# Allegro board DECADECOUNTERPC30new.brd
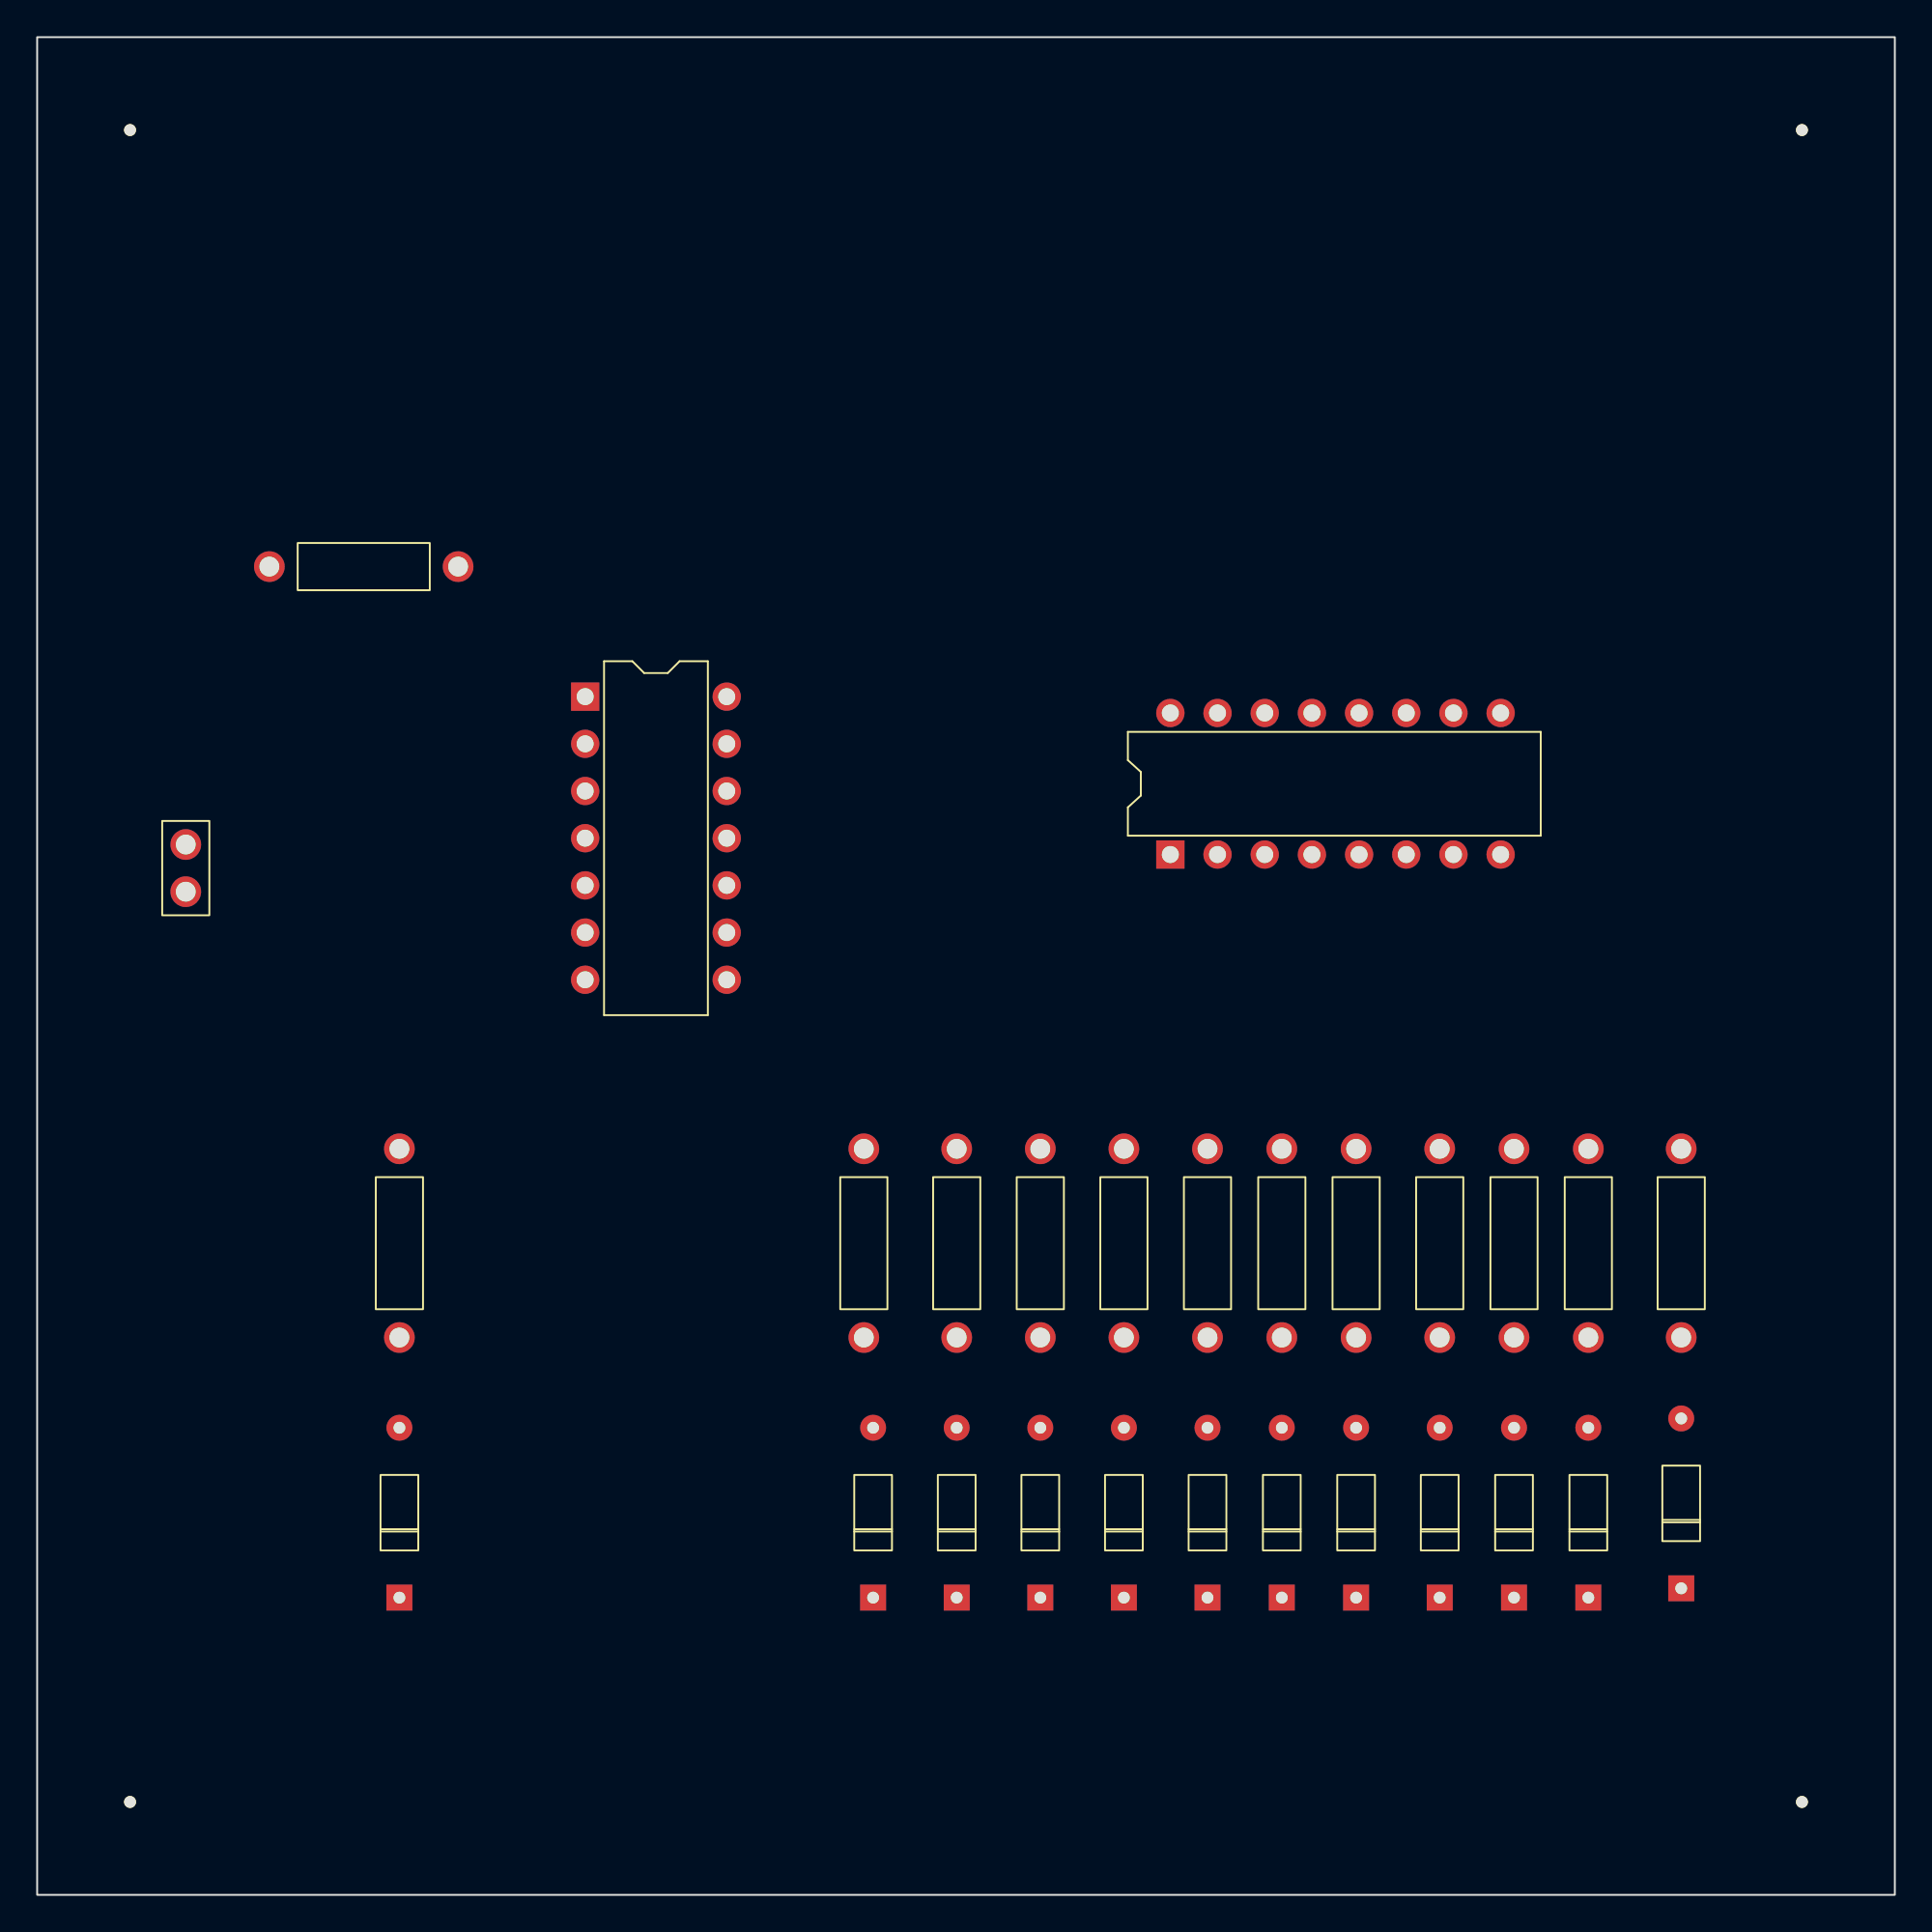
[diagram p0: board, top side]
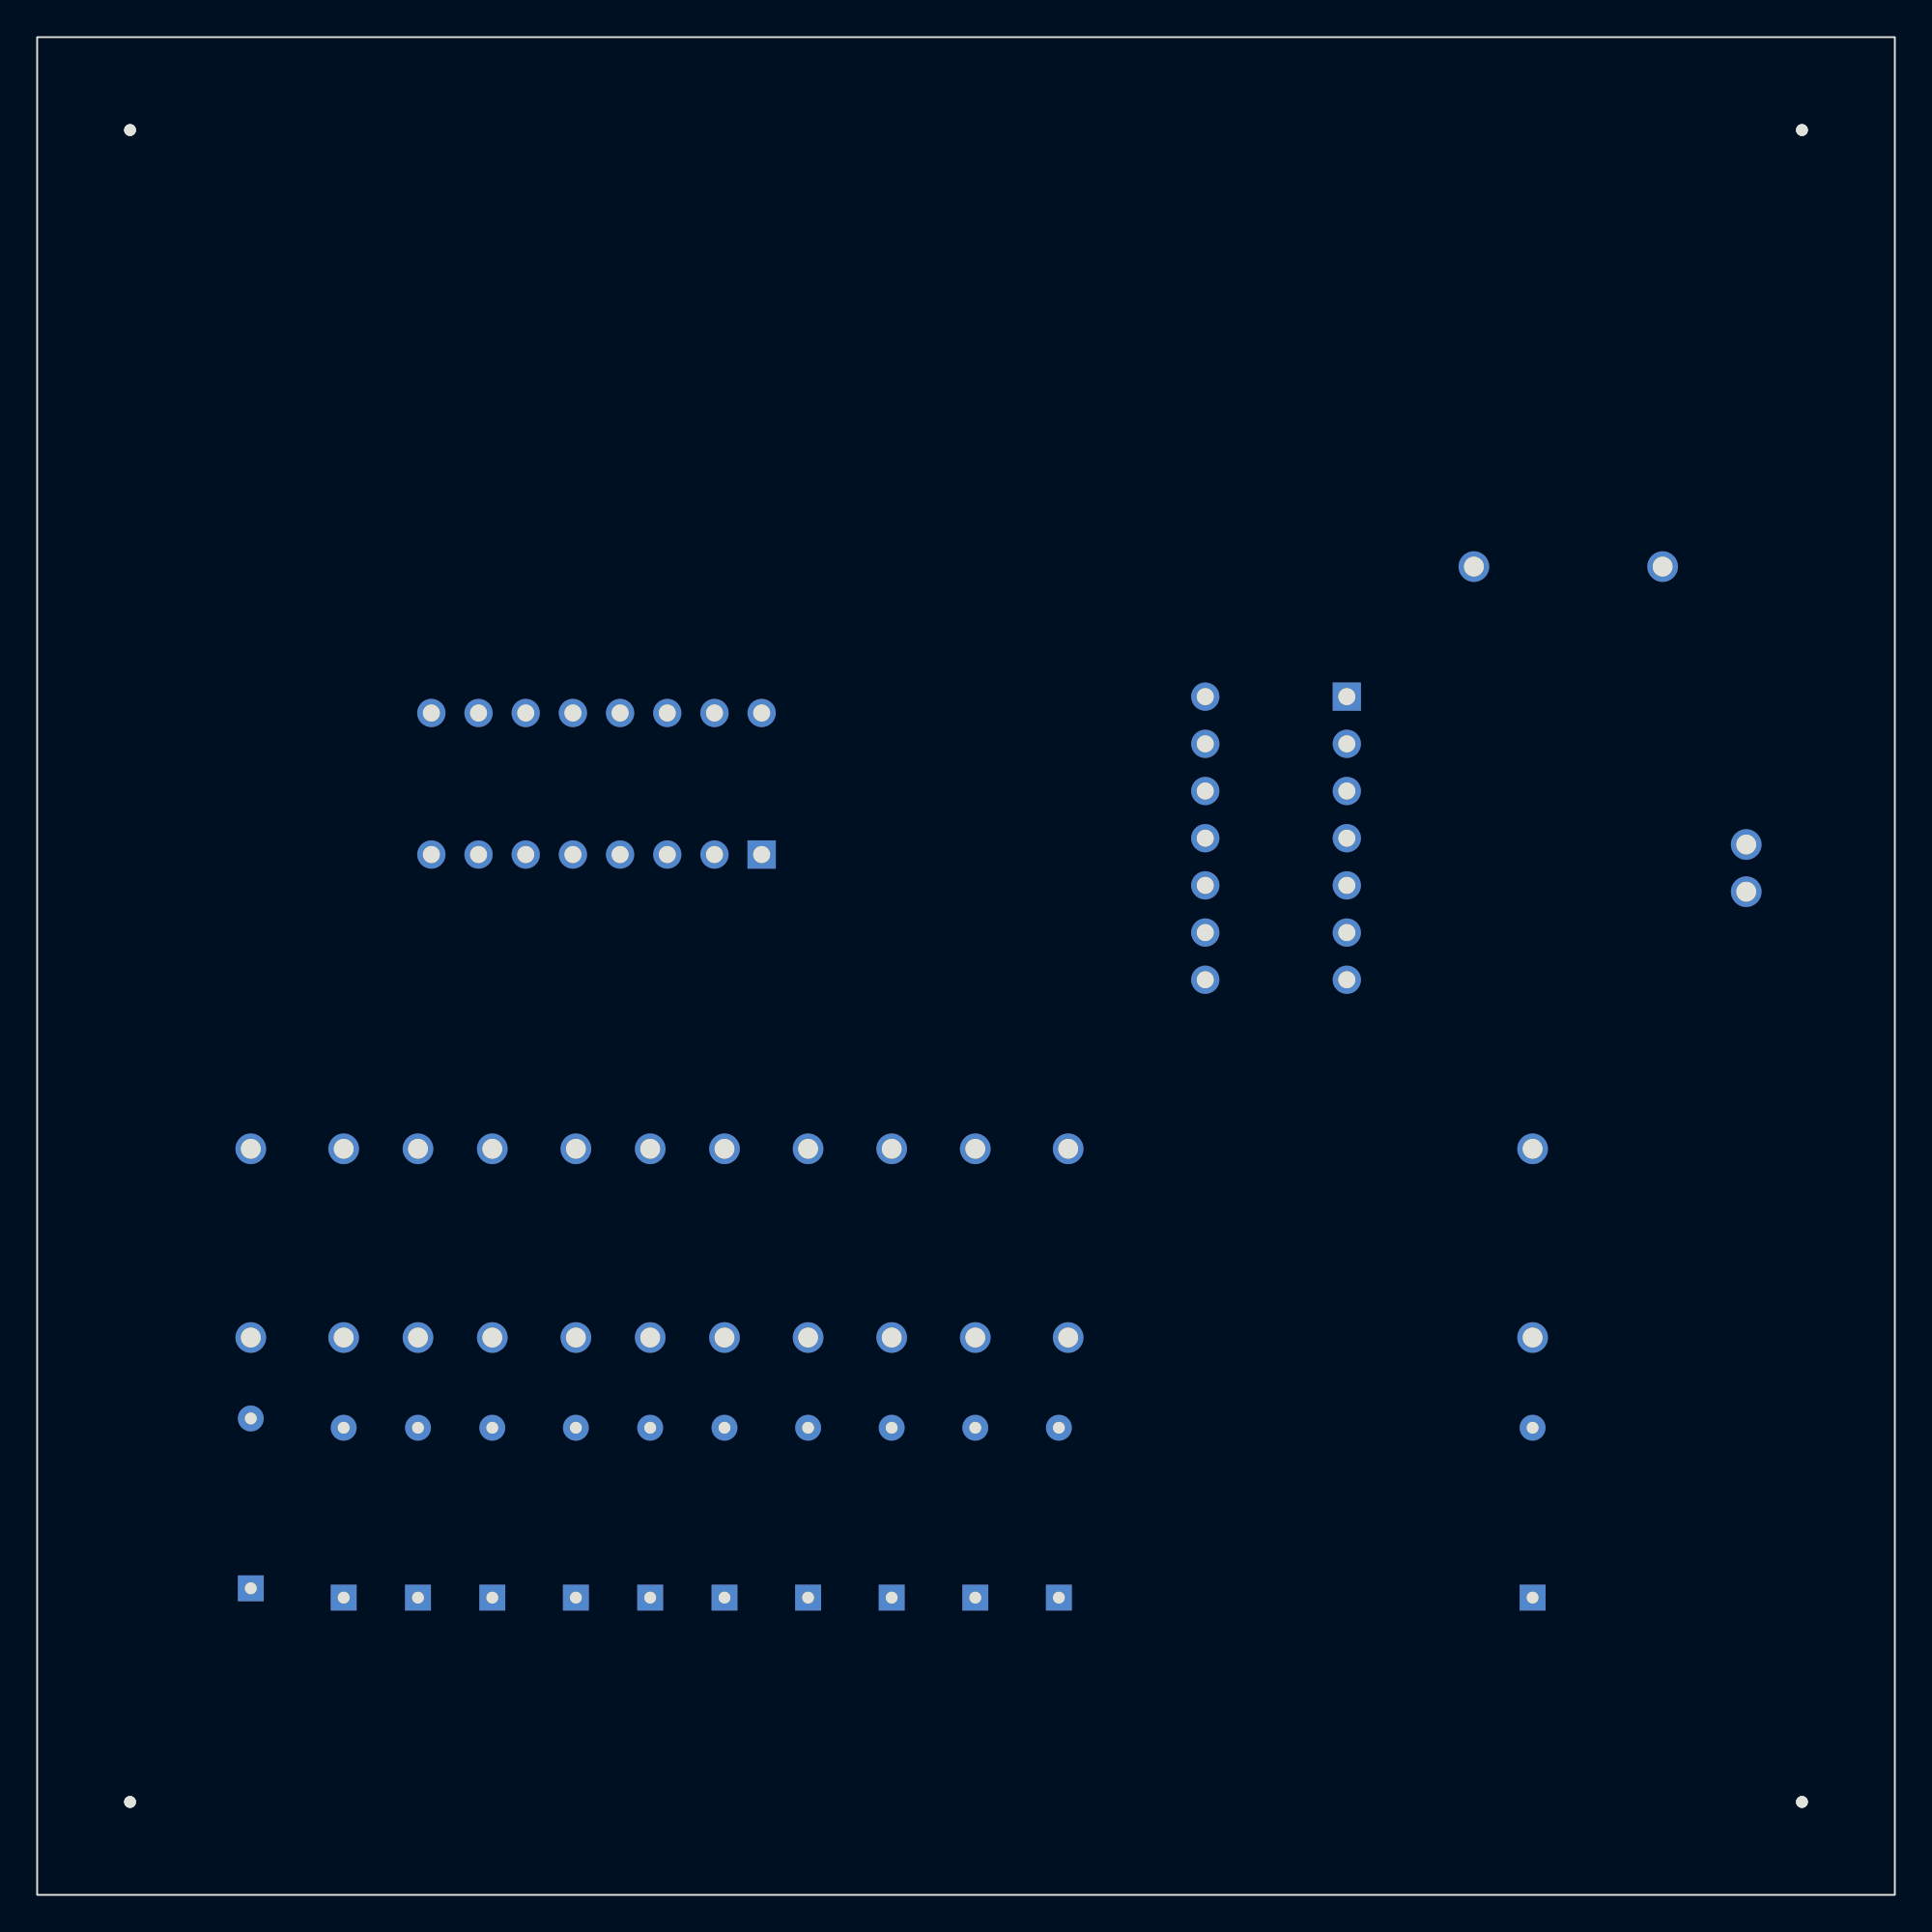
[diagram p1: board, bottom side, seen from below]

Outline 100 x 100 mm; copper layers: TOP, BOTTOM. Coordinates in mm from the lower left corner of the outline.
Outline path: rectangle 0,0 100,100

## Placement (name value [footprint] x y rotation side)
C1  CAP  [CAPCK05]  8 54 0 top
D1  LED  [DO35]  19.5 16 0 top
D2  LED  [DO35]  45 16 0 top
D3  LED  [DO35]  49.5 16 0 top
D4  LED  [DO35]  54 16 0 top
D5  LED  [DO35]  58.5 16 0 top
D6  LED  [DO35]  63 16 0 top
D7  LED  [DO35]  67 16 0 top
D8  LED  [DO35]  71 16 0 top
D9  LED  [DO35]  75.5 16 0 top
D10  LED  [DO35]  79.5 16 0 top
D11  LED  [DO35]  83.5 16 0 top
D12  LED  [DO35]  88.5 16.5 0 top
NOREF  -  [unnamed]  95 95 0 top
NOREF#2  -  [unnamed]  5 5 0 top
NOREF#3  -  [unnamed]  95 5 0 top
NOREF#4  -  [unnamed]  5 95 0 top
R1  R  [RES400]  12.5 71.5 270 top
R2  200  [RES400]  19.5 30 0 top
R3  200  [RES400]  44.5 30 0 top
R4  200  [RES400]  49.5 30 0 top
R5  200  [RES400]  54 30 0 top
R6  200  [RES400]  58.5 30 0 top
R7  200  [RES400]  63 30 0 top
R8  200  [RES400]  67 30 0 top
R9  200  [RES400]  71 30 0 top
R10  200  [RES400]  75.5 30 0 top
R11  200  [RES400]  79.5 30 0 top
R12  200  [RES400]  83.5 30 0 top
R13  200  [RES400]  88.5 30 0 top
U1  74HC14  [DIP14_3]  29.5 64.5 0 top
U2  74HC4017  [DIP16_3]  61 56 90 top

## Library data of the parts
C1 = CAP: Tolerance: ***; User Part Number: ***
D1-D12 = LED
R1-R13 = R: Tolerance: ***; User Part Number: ***
U1 = 74HC14: Tolerance: ***; User Part Number: ***
U2 = 74HC4017_0: Tolerance: ***; User Part Number: ***

## Footprints (pads in the part's own frame, mm; a bottom-side part is the same pattern mirrored in y, then rotated)
CAPCK05
  round 1.651 hole 1.067: 1(0,0) 2(0,2.54)
DIP14_3
  rect 1.524x1.524 hole 0.914: 1(0,0)
  round 1.524 hole 0.914: 2(0,-2.54) 3(0,-5.08) 4(0,-7.62) 5(0,-10.16) 6(0,-12.7) 7(0,-15.24) 8(7.62,-15.24) 9(7.62,-12.7) 10(7.62,-10.16) 11(7.62,-7.62) 12(7.62,-5.08) 13(7.62,-2.54) 14(7.62,0)
DIP16_3
  rect 1.524x1.524 hole 0.914: 1(0,0)
  round 1.524 hole 0.914: 2(0,-2.54) 3(0,-5.08) 4(0,-7.62) 5(0,-10.16) 6(0,-12.7) 7(0,-15.24) 8(0,-17.78) 9(7.62,-17.78) 10(7.62,-15.24) 11(7.62,-12.7) 12(7.62,-10.16) 13(7.62,-7.62) 14(7.62,-5.08) 15(7.62,-2.54) 16(7.62,0)
DO35
  rect 1.397x1.397 hole 0.635: 1(0,0)
  round 1.397 hole 0.635: 2(0,9.144)
RES400
  round 1.651 hole 1.067: 1(0,0) 2(0,10.16)
unnamed
  round 0.635 hole 3.175 unplated: (0,0)

## Nets
GND: C1.2 D1.1(CATHODE) D2.1(CATHODE) D3.1(CATHODE) D4.1(CATHODE) D5.1(CATHODE) D6.1(CATHODE) D7.1(CATHODE) D8.1(CATHODE) D9.1(CATHODE) D10.1(CATHODE) D11.1(CATHODE) D12.1(CATHODE) U1.7 U2.8 U2.13(C\K\E\) U2.15(RST)
VCC: U1.14 U2.16
N00790: C1.1 R1.1 U1.1(A)
N00808: R1.2 U1.2(Y) U1.3(A)
N00812: R2.1 U1.4(Y) U2.14(CLK)
N00845: D1.2(ANODE) R2.2
N00874: D12.2(ANODE) R13.2
N00878: D11.2(ANODE) R12.2
N00882: D10.2(ANODE) R11.2
N00901: D9.2(ANODE) R10.2
N00905: D8.2(ANODE) R9.2
N00917: D7.2(ANODE) R8.2
N00921: D6.2(ANODE) R7.2
N00925: D5.2(ANODE) R6.2
N00929: D4.2(ANODE) R5.2
N00933: D3.2(ANODE) R4.2
N00937: D2.2(ANODE) R3.2
N01261: R3.1 U2.12(CO)
N01268: R4.1 U2.3(Q0)
N01275: R5.1 U2.2(Q1)
N01282: R6.1 U2.4(Q2)
N01289: R7.1 U2.7(Q3)
N01296: R8.1 U2.10(Q4)
N01303: R9.1 U2.1(Q5)
N01310: R10.1 U2.5(Q6)
N01317: R11.1 U2.6(Q7)
N01324: R12.1 U2.9(Q8)
N01331: R13.1 U2.11(Q9)

Pads without a net: U1 5 6 8 9 10 11 12 13
